# Altium PCB Probe-input.PcbDoc
Units mm, origin at the board's own origin, x right, y up, seen from the top; angles counter-clockwise.
Board outline 32 x 20 mm, 4 copper layers (Top, Ground, Signal/Power, Bottom), stack 1.553 mm thick; 15 components, 32 nets, 49 pads, 78 vias.
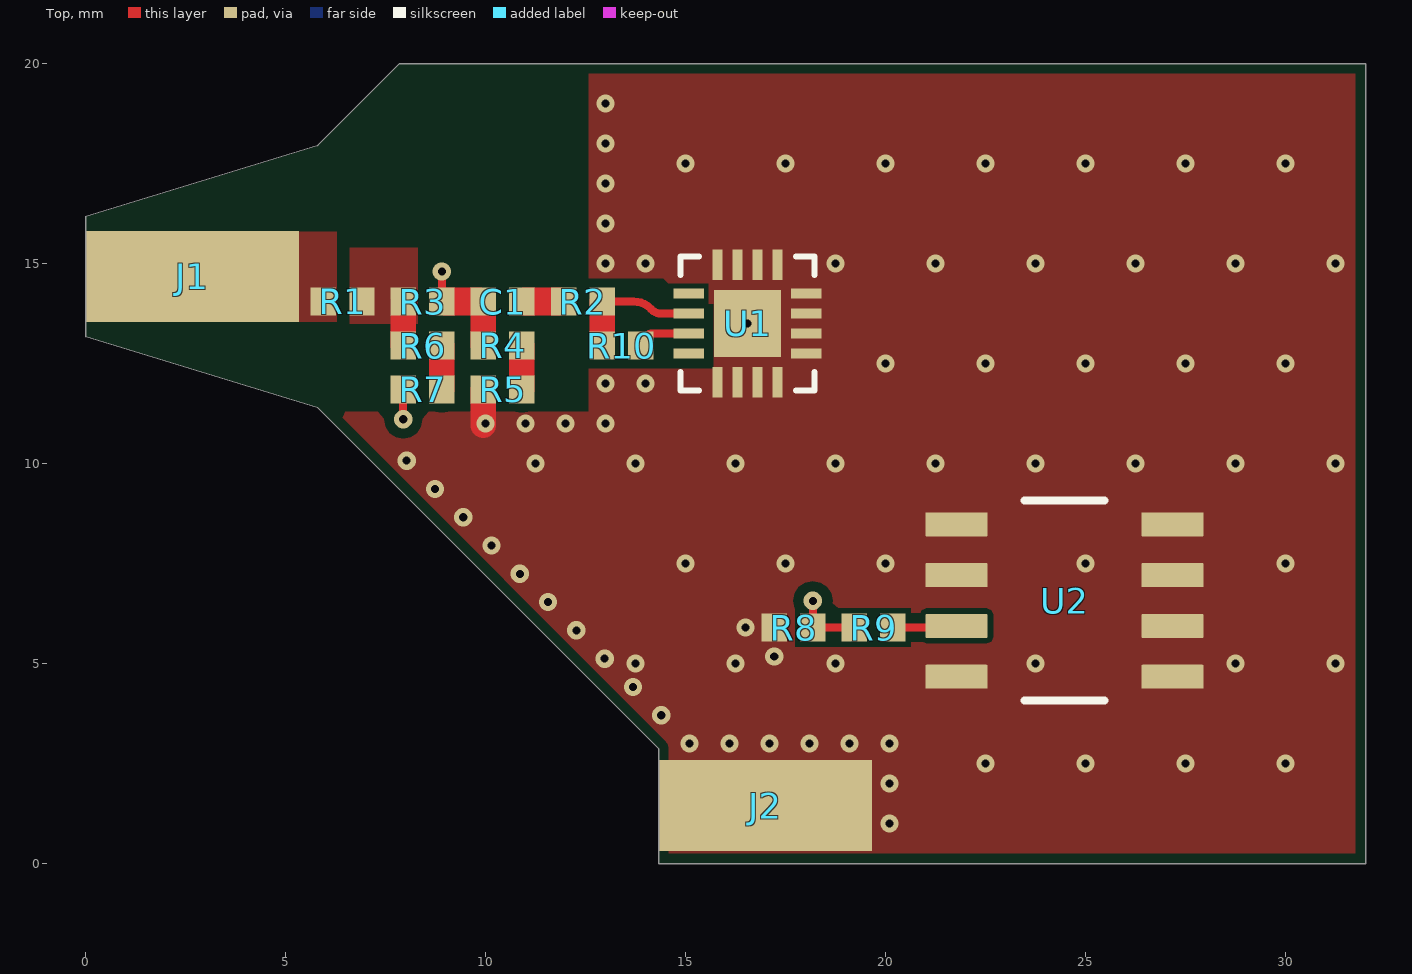
[diagram p0: Top view]
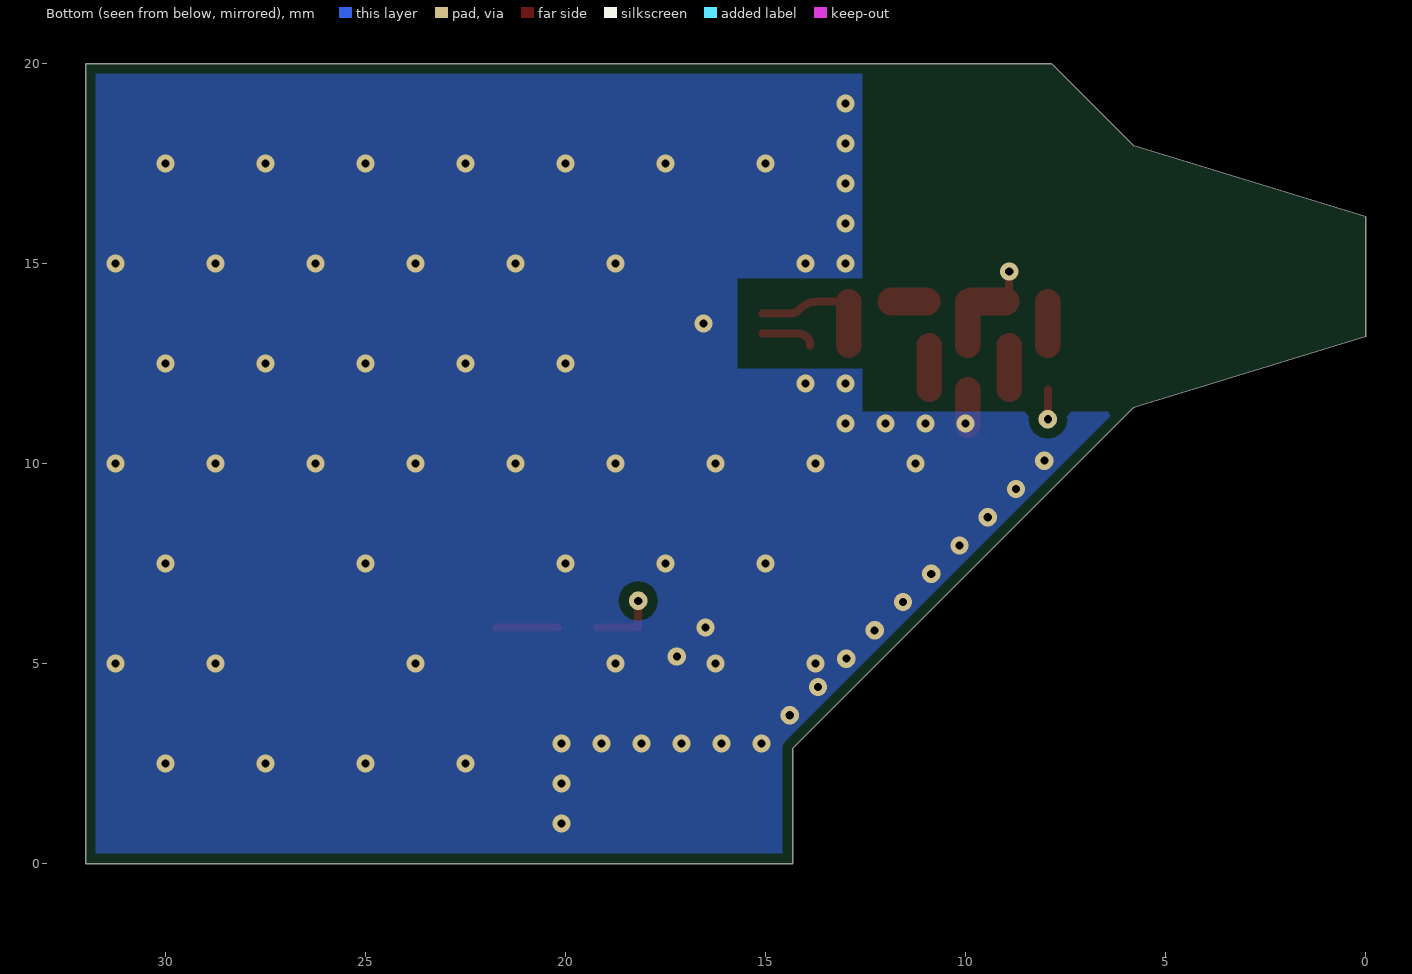
[diagram p1: Bottom view, seen from below]
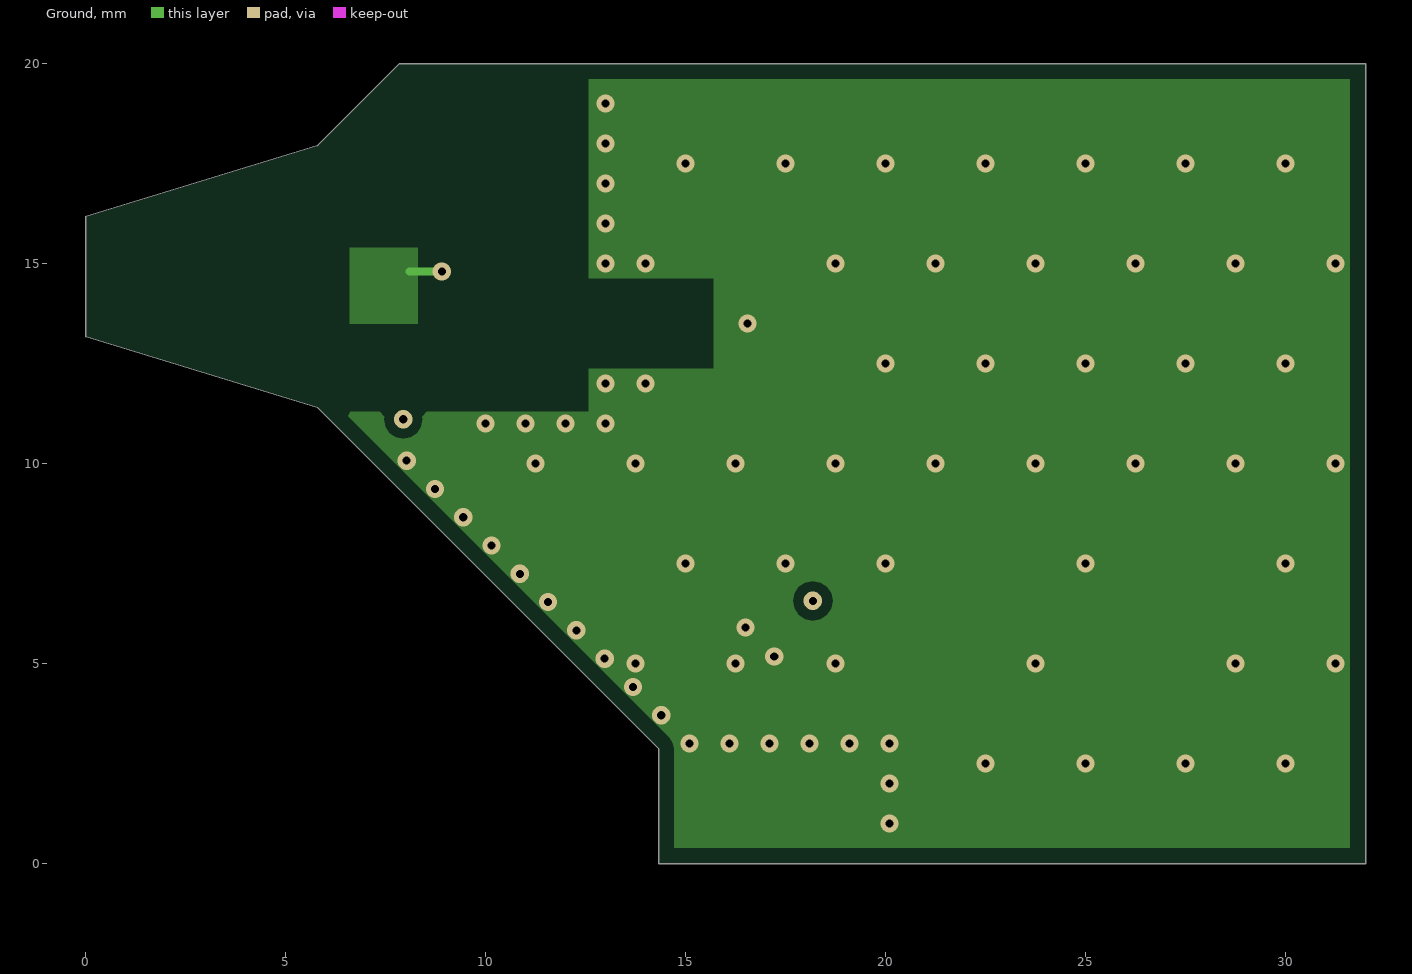
[diagram p2: Ground]
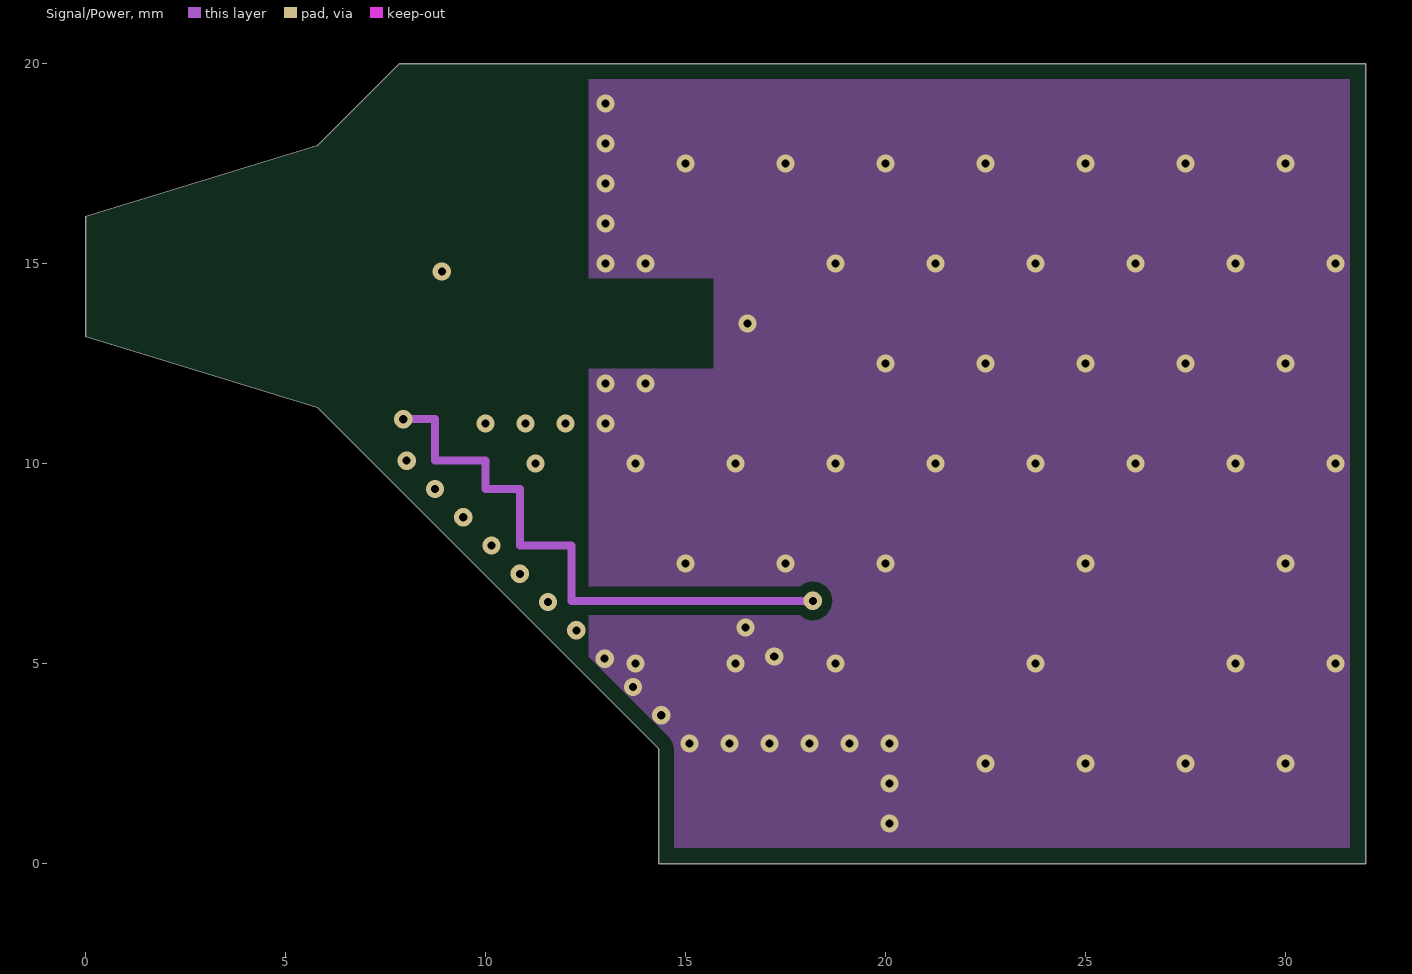
[diagram p3: Signal/Power]
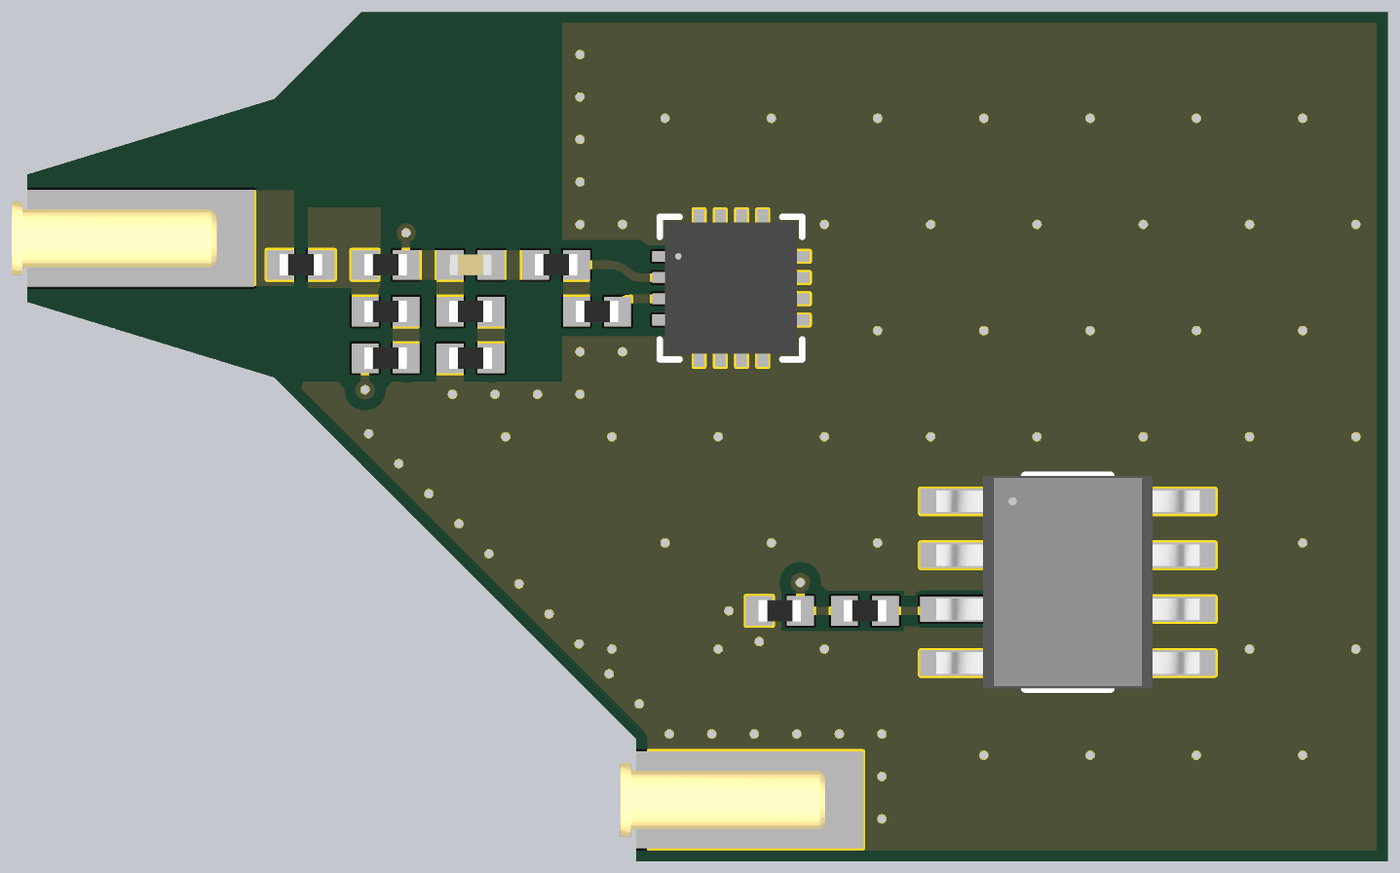
[diagram p4: 3D render of the assembled board from above, using the file's embedded part models]

## Layer stack, top to bottom
Top Solder: solder mask 0.0254, Solder Resist, Dk 3.5
Top: signal copper 0.0432
Dielectric 1: core 0.2022, FR-4, Dk 3.68
Ground: signal copper 0.036
Dielectric 3: core 0.9906, Dk 3.68
Signal/Power: signal copper 0.036
Dielectric 4: prepreg 0.2022, Dk 3.68
Bottom: signal copper 0.0432
Bottom Solder: solder mask 0.0254, Solder Resist, Dk 3.5

## Board outline
0,13.175 0,16.175 5.8,17.95 7.85,20 32,20 32,0 14.325,0 14.325,2.875 5.8,11.4

## Design rules (kind name [scope] priority, off if disabled: settings)
BoardOutlineClearance BoardOutlineClearance_outer [OnOutside] p1: gap=0.254 ignorepadtopadclearanceinfootprint=FALSE
BoardOutlineClearance BoardOutlineClearance_inner [not OnOutside] p2: gap=0.381 ignorepadtopadclearanceinfootprint=FALSE
Clearance [All] p1: gap=0.254 ignorepadtopadclearanceinfootprint=FALSE except(0: Arc-Hole Track-Hole SMDPad-Hole THPad-Hole Via-Hole Fill-Hole Poly-Hole Region-Hole Text-Hole; 0.127: SMDPad-SMDPad SMDPad-Fill SMDPad-Poly SMDPad-Region)
MinimumSolderMaskSliver [All] p1: minsoldermaskwidth=0.127
PlaneConnect [All] p1: planeconnectstyle=Direct reliefexpansion=0.508 reliefentries=4 reliefconductorwidth=0.254 reliefairgap=0.254
PolygonConnect [All] p1: connectstyle=Direct reliefconductorwidth=0.254 reliefentries=4 polygonreliefangle="90 Angle" airgapwidth=0.254
RoutingVias [All] p1: holewidth=0.457 width=0.457 viastyle="Through Hole" minholewidth=0.203 minwidth=0.457 maxholewidth=0.711 maxwidth=1.27
SilkToSolderMaskClearance [IsPad] p1: minsilkscreentomaskgap=0.127 clearancetoexposedcopper=TRUE
SolderMaskExpansion [All] p1: expansion=0.051
Width [All] p1: maxlimit=5.08 minlimit=0.102 preferedwidth=0.254
27 further rules are at their usual default settings.

## Classes and differential pairs
component class Power: C6 C7 C11 C13 C14 C15 C20 C21 C? R22 R23 R? U3 U?

## Components (designator, comment, footprint, x,y, rotation, side; value= is the part's Value field where it differs from the comment)
C1 "330p" CAPC0402(1005)50_M 10.425,14.05 r0 top
J1 "0339-0-15-01-15-27-10-0" "MILL-MAX 0339"#1 0.008,14.675 r0 top
J2 "0339-0-15-01-15-27-10-0" "MILL-MAX 0339"#2 14.325,1.45 r0 top
R1 "82" RESC0402(1005)_M 6.43,14.05 r0 top
R2 "100" RESC0402(1005)_M 12.435,14.05 r0 top
R3 "1.60M" RESC0402(1005)_M 8.425,14.05 r0 top
R4 "200K" RESC0402(1005)_M 10.425,12.95 r0 top
R5 "200K" RESC0402(1005)_M 10.425,11.85 r180 top
R6 "976K" RESC0402(1005)_M 8.425,12.95 r0 top
R7 "953K" RESC0402(1005)_M 8.425,11.85 r180 top
R8 "66.5k" RESC0402(1005)_M 17.7,5.9 r180 top value=66.5K
R9 "68" RESC0402(1005)_M 19.7,5.9 r0 top
R10 "10.0M" RESC0402(1005)_M 13.4,12.95 r0 top
U1 "BUF802" "VQFN16_RGT_TEX- OSHPARK" 16.55,13.5 r0 top
U2 "ADA4625" SOIC-8 24.475,6.575 r0 top

## Footprints (in the part's own frame and the unit in brackets; to place one, negate y for a bottom-side part, rotate by r counter-clockwise, add the part's x,y. Pads: shape width x height; smd on the part's side, far side on the other; paste and mask are expansions set on the pad)
CAPC0402(1005)50_M [mm] "Chip Capacitor, Body 1.0x0.5mm, Height 0.5mm, IPC Low  Density"
  rect 0.635x0.7 smd: 1(-0.483,0) 2(0.483,0)
  body extent -0.5,-0.25 0.5,0.25, height 0.5
"MILL-MAX 0339"#1 [mil] "MILL-MAX 0339"
  rect 210x90 smd: 1(104.69,0)
  body extent -15,-34 175,34, height 61
"MILL-MAX 0339"#2 [mil] "MILL-MAX 0339"
  rect 210x90 smd: 1(105,0)
  body extent -15,-34 175,34, height 61
RESC0402(1005)_M [mm] "Chip Resistor, Body 1.0x0.5mm, IPC Low Density"
  rect 0.635x0.7 smd: 1(-0.483,0) 2(0.482,0)
  body extent -0.5,-0.25 0.5,0.25, height 0.35
SOIC-8 [mm] "SOIC-8"
  rrect8% 1.55x0.6 smd: 1(-2.7,1.905) 2(-2.7,0.635) 3(-2.7,-0.635) 4(-2.7,-1.905) 5(2.7,-1.905) 6(2.7,-0.635) 7(2.7,0.635) 8(2.7,1.905)
  silkscreen extent -1,-2.5 1,2.5, body extent -3.1,-2.5 3.1,2.5, height 1.76
"VQFN16_RGT_TEX- OSHPARK" [mil]
  rect 30x10 smd: 1(-58,29.53) 2(-58,9.84) 3(-58,-9.85) 4(-58,-29.54) 9(58,-29.54) 10(58,-9.85) 11(58,9.84) 12(58,29.53)
  rect 10x30 smd: 5(-29.53,-58) 6(-9.85,-58) 7(9.85,-58) 8(29.53,-58) 13(29.53,58) 14(9.85,58) 15(-9.85,58) 16(-29.53,58)
  rect 66.14x66.14 smd: 17(0,0)
  silkscreen extent -66,-66 66,66, body extent -61,-61 61,61, height 39

## Part data
C1: library part GRM1555C1H331JA01, "CAP CER 330PF±5% 50V C0G 0402", Capacitance=330pF, Manufacturer=Murata, Manufacturer Part Number=GRM1555C1H331JA01D, Temperature Coefficient=C0G, Tolerance=±5%, Part Number=GRM1555C1H331JA01
J1 J2: "CONN PIN RCPT", Manufacturer=Mill-Max, Max Operating Temperature=125°C, Min Operating Temperature=-55°C, Supplier Part Number 1=0339-0-15-01-15-27-10-0-ND, ComponentLink1Description=https://www.mill-max.com/assets/pdfs/172.pdf?src-supplier=Digi-Key, ComponentLink1URL=https://www.mill-max.com/assets/pdfs/172.pdf?src-supplier=Digi-Key, ComponentLink2Description=https://datasheet.octopart.com/0339-0-15-01-15-27-10-0-Mill-Max-datasheet-26446830.pdf?src-supplier=Future+Electronics, ComponentLink2URL=https://datasheet.octopart.com/0339-0-15-01-15-27-10-0-Mill-Max-datasheet-26446830.pdf?src-supplier=Future+Electronics, ComponentLink3Description=http://www.mouser.com/ds/2/273/172M-276194.pdf?src-supplier=Mouser, ComponentLink3URL=http://www.mouser.com/ds/2/273/172M-276194.pdf?src-supplier=Mouser, ComponentLink4Description=https://datasheet.octopart.com/0339-0-15-01-15-27-10-0-Mill-Max-datasheet-155663258.pdf?src-supplier=Sager+Electronics, ComponentLink4URL=https://datasheet.octopart.com/0339-0-15-01-15-27-10-0-Mill-Max-datasheet-155663258.pdf?src-supplier=Sager+Electronics, Contact Material=Copper, Contact Plating=Gold, Manufacturer Part Number=0339-0-15-01-15-27-10-0, Packaging=Bulk, Pricing 1="1=1.42, 10=1.234, 25=1.1812, 50=1.155, 100=1.1025, 250=0.99748, 500=0.91874, 1000=0.7875, 2500=0.735 (USD)", RoHS Compliant=No, Series=0339, Stock 1=989, Supplier 1=Digi-Key, Supplier 2=Mouser, Supplier Part Number 2=575-0339015011527100, Termination=Solder
R1: library part RESC0402-82R0-1pct, "RES 82 OHM 1% 1/16W 0402", Manufacturer 1=Yageo, Manufacturer 2="Stackpole Electronics", Manufacturer 3="Vishay Dale", Manufacturer 4="Panasonic Electronic Components", Manufacturer Part Number 1=RC0402FR-0782RL, Manufacturer Part Number 2=RMCF0402FT82R0, Manufacturer Part Number 3=CRCW040282R0FKED, Manufacturer Part Number 4=ERJ-2RKF82R0X, Ohms=82, Part Number=RESC0402-82R0-1pct
R2: library part RESC0402-100R-1pct, "RES 100 OHM 1% 1/16W 0402", Manufacturer 1=Yageo, Manufacturer 2="Stackpole Electronics", Manufacturer 3="Vishay Dale", Manufacturer 4="Panasonic Electronic Components", Manufacturer Part Number 1=RC0402FR-07100RL, Manufacturer Part Number 2=RMCF0402FT100R, Manufacturer Part Number 3=CRCW0402100RFKED, Manufacturer Part Number 4=ERJ-2RKF1000X, Ohms=100, Part Number=RESC0402-100R-1pct
R3: library part RESC0402-1M60-1pct, "RES 1.60M OHM 1% 1/16W 0402", Manufacturer 1=Yageo, Manufacturer 2="Stackpole Electronics", Manufacturer 3="Vishay Dale", Manufacturer 4="Panasonic Electronic Components", Manufacturer Part Number 1=RC0402FR-071M6L, Manufacturer Part Number 2=RMCF0402FT1M60, Manufacturer Part Number 3=CRCW04021M60FKED, Ohms=1600000, Part Number=RESC0402-1M60-1pct
R4 R5: library part RESC0402-200K-1pct, "RES 200K OHM 1% 1/16W 0402", Manufacturer 1=Yageo, Manufacturer 2="Stackpole Electronics", Manufacturer 3="Vishay Dale", Manufacturer 4="Panasonic Electronic Components", Manufacturer Part Number 1=RC0402FR-07200KL, Manufacturer Part Number 2=RMCF0402FT200K, Manufacturer Part Number 3=CRCW0402200KFKED, Manufacturer Part Number 4=ERJ-2RKF2003X, Ohms=200000, Part Number=RESC0402-200K-1pct
R6: library part RESC0402-976K-1pct, "RES 976K OHM 1% 1/16W 0402", Manufacturer 1=Yageo, Manufacturer 2="Stackpole Electronics", Manufacturer 3="Vishay Dale", Manufacturer 4="Panasonic Electronic Components", Manufacturer Part Number 1=RC0402FR-07976KL, Manufacturer Part Number 2=RMCF0402FT976K, Manufacturer Part Number 3=CRCW0402976KFKED, Manufacturer Part Number 4=ERJ-2RKF9763X, Ohms=976000, Part Number=RESC0402-976K-1pct
R7: library part RESC0402-953K-1pct, "RES 953K OHM 1% 1/16W 0402", Manufacturer 1=Yageo, Manufacturer 2="Stackpole Electronics", Manufacturer 3="Vishay Dale", Manufacturer 4="Panasonic Electronic Components", Manufacturer Part Number 1=RC0402FR-07953KL, Manufacturer Part Number 2=RMCF0402FT953K, Manufacturer Part Number 3=CRCW0402953KFKED, Manufacturer Part Number 4=ERJ-2RKF9533X, Ohms=953000, Part Number=RESC0402-953K-1pct
R8: library part RESC0402-66K5-1pct, "RES 66.5K OHM 1% 1/16W 0402", Manufacturer 1=Yageo, Manufacturer 2="Stackpole Electronics", Manufacturer 3="Vishay Dale", Manufacturer 4="Panasonic Electronic Components", Manufacturer Part Number 1=RC0402FR-0766K5L, Manufacturer Part Number 2=RMCF0402FT66K5, Manufacturer Part Number 3=CRCW040266K5FKED, Manufacturer Part Number 4=ERJ-2RKF6652X, Ohms=66500, Part Number=RESC0402-66K5-1pct
R9: library part RESC0402-68R0-1pct, "RES 68 OHM 1% 1/16W 0402", Manufacturer 1=Yageo, Manufacturer 2="Stackpole Electronics", Manufacturer 3="Vishay Dale", Manufacturer 4="Panasonic Electronic Components", Manufacturer Part Number 1=RC0402FR-0768RL, Manufacturer Part Number 2=RMCF0402FT68R0, Manufacturer Part Number 3=CRCW040268R0FKED, Manufacturer Part Number 4=ERJ-2RKF68R0X, Ohms=68, Part Number=RESC0402-68R0-1pct
R10: library part RESC0402-10M0-1pct, "RES 10.0M OHM 1% 1/16W 0402", Manufacturer 1=Yageo, Manufacturer 2="Stackpole Electronics", Manufacturer 3="Vishay Dale", Manufacturer 4="Panasonic Electronic Components", Manufacturer Part Number 1=RC0402FR-0710ML, Manufacturer Part Number 2=RMCF0402FT10M0, Manufacturer Part Number 3=CRCW040210M0FKED, Ohms=10000000, Part Number=RESC0402-10M0-1pct
U1: library part BUF802IRGTR, "WIDE-BANDWIDTH JFET BUFFER", Manufacturer="Texas Instruments", Supplier Part Number 1=296-BUF802IRGTRCT-ND, Manufacturer Part Number=BUF802IRGTR, Pricing 1="1=5.06, 10=4.541, 25=4.2928, 100=3.7206, 250=3.5298, 500=3.16728, 1000=2.88 (USD)", Stock 1=1253, Supplier 1=Digi-Key, Supplier 2=Mouser, Supplier Part Number 2=595-BUF802IRGTR
U2: library part ADA4625-1ARDZ, "IC OPAMP JFET 8SOIC", Input Bias Current=15pA, Input Offset Voltage (Vos)=15uV, Manufacturer="Analog Devices", Max Operating Temperature=125°C, Min Operating Temperature=-40°C, Operating Supply Current=4mA, Output Current per Channel=33mA, Supplier Part Number 1=505-ADA4625-1ARDZ-ND, -3db Bandwidth=16MHz, ComponentLink1Description=https://www.analog.com/media/en/technical-documentation/data-sheets/ADA4625-1.pdf?src-supplier=Digi-Key, ComponentLink1URL=https://www.analog.com/media/en/technical-documentation/data-sheets/ADA4625-1.pdf?src-supplier=Digi-Key, Gain Bandwidth Product=18MHz, Manufacturer Part Number=ADA4625-1ARDZ, Mount="Surface Mount", Number of Circuits=1, Number of Pins=8, Packaging=Rail/Tube, Pricing 1="1=12.08, 10=10.916, 25=10.4088, 100=9.0378, 250=8.6316, 500=7.86996, 1000=7.185 (USD)", RoHS Compliant=Yes, Series=-, Slew Rate=48V/µs, Stock 1=2217, Supplier 1=Digi-Key, Supplier 2=Mouser, Supplier Part Number 2=584-ADA4625-1ARDZ

## Via types
v1: diameter 0.457, hole 0.203, Top to Bottom, tented both sides, 78 vias

## Nets (pads, with @x,y where several pads share a name; then routed paths per layer and width w, separated by ;. In a path a pad name is that pad's centre, name@x,y a point inside that pad or via, vN(x,y) a via of type N, cw(c..) or ccw(c..) an arc to the next point about the centre after c; other vN are vias at no path point)
GND: J2.1 R5.2 R8.2 U1.5 U1.6 U1.7 U1.8 U1.9 U1.10 U1.11 U1.12 U1.13 U1.14 U1.15 U1.16 U1.17 U2.1 U2.2 U2.4 U2.5 U2.6 U2.7 U2.8 | length 0.9
  Top w0.635: v1@9.942,10.958 R5.2
  other v1: 20.1,1 20.1,2 22.5,2.5 25,2.5 27.5,2.5 30,2.5 15.1,3 16.1,3 17.1,3 18.1,3 19.1,3 20.1,3 14.393,3.707 13.686,4.414 13.75,5 16.25,5 18.75,5 23.75,5 28.75,5 31.25,5 12.979,5.121 17.217,5.175 12.272,5.828 16.5,5.9 11.564,6.536 10.857,7.243 15,7.5 17.5,7.5 20,7.5 25,7.5 30,7.5 10.15,7.95 9.443,8.657 8.736,9.364 11.25,10 13.75,10 16.25,10 18.75,10 21.25,10 23.75,10 26.25,10 28.75,10 31.25,10 8.029,10.071 10,11 11,11 12,11 13,11 13,12 14,12 20,12.5 22.5,12.5 25,12.5 27.5,12.5 30,12.5 16.55,13.5 13,15 14,15 18.75,15 21.25,15 23.75,15 26.25,15 28.75,15 31.25,15 13,16 13,17 15,17.5 17.5,17.5 20,17.5 22.5,17.5 25,17.5 27.5,17.5 30,17.5 13,18 13,19
GUARD: C1.1 R3.2 R4.1 | length 3.5
  Top w0.2: R3.2 v1(8.907,14.8)
  Top w0.635: R4.1 C1.1
  Top w0.7: R3.2@9,14.05 C1.1@9.85,14.05
  Ground w0.2: 8.1,14.8 v1(8.907,14.8)
NetC1_2: C1.2 R2.1 | length 0.9
  Top w0.7: C1.2@10.975,14.05 R2.1@11.85,14.05
NetC2_1: 
NetC2_2: 
NetC3_1: 
NetC4_1: 
NetC5_1: 
NetC5_2: 
NetC6_1: 
NetC7_1: 
NetD1_1: 
NetD2_1: 
NetJ3_1: 
NetR1_2: R1.2 R3.1 R6.1 | length 1.1
  Top w0.635: R6.1 R3.1
NetR2_2: R2.2 R10.1 U1.2 | length 3.3
  Top w0.2: R2.2 13.703,14.05 cw(c13.703,13.453) 14.125,13.875 14.15,13.85 ; 14.15,13.85 ccw(c14.392,14.092) 14.392,13.75 U1.2
  Top w0.635: R10.1 R2.2
NetR4_2: R4.2 R5.1 | length 1.1
  Top w0.635: R5.1@10.908,11.85 R4.2
NetR6_2: R6.2 R7.1 | length 1.1
  Top w0.635: R7.1 R6.2
NetR7_2: R7.2 R8.1 R9.1 | length 17.2
  Top w0.2: v1(7.942,11.107) R7.2 ; v1(18.182,6.567) R8.1 R9.1
  Signal/Power w0.2: v1(7.942,11.107) 8.736,11.107 8.736,10.071 10,10.071 10,9.364 10.857,9.364 10.857,7.95 12.147,7.95 12.147,6.567 v1(18.182,6.567)
NetR9_2: R9.2 U2.3 | length 1.6
  Top w0.2: R9.2 U2.3@21.735,5.9
NetR10_2: R10.2 U1.3 | length 1.4
  Top w0.2: R10.2 cw(c14.182,12.95) 14.182,13.25 U1.3
NetR11_2: 
NetR12_2: 
NetR16_1: 
NetR17_1: 
NetR18_1: 
NetR23_2: 
TIP: J1.1 R1.1
V+: 
V-: 
VDD: 
VSS: 
pads on no net: U1.1 U1.4

## Polygon pours and split planes (outlines as drawn)
GND on Top "GND_L01_P049" (solid, pour order 49): 12.583,11.3 5.9,11.3 5.9,0 32,0 32,20 12.583,20
NetR1_2 on Top "NETR1_2_L01_P033" (solid, pour order 33): 6.6,13.5 8.3,13.5 8.3,15.4 6.6,15.4
TIP on Top "TIP_L01_P032" (solid, pour order 32): 4.575,15.8 6.275,15.8 6.275,13.55 4.575,13.55
GND on Ground "GND_L02_P051" (solid, pour order 51): 12.583,11.3 5.875,11.3 5.875,0 32,0 32,20 12.583,20
GUARD on Ground "GUARD_L02_P050" (solid, pour order 50): 6.6,13.5 8.3,13.5 8.3,15.4 6.6,15.4
GND on Bottom "GND_L04_P052" (solid, pour order 52): 12.583,11.3 5.9,11.3 5.9,0 12.583,0 32,0 32,20 12.583,20
GND on Signal/Power "GND_L03_P054" (solid, pour order 54): 32,0 32,20 12.583,20 12.583,0

## Other copper
Top:
  pour cut-out: 14.444,14.631 14.444,14 15.71,14 15.71,12.369 12.583,12.369 12.583,14.631
Signal/Power:
  pour cut-out: 15.71,12.369 12.583,12.369 12.583,14.631 15.71,14.631
Ground:
  pour cut-out: 15.71,12.369 12.583,12.369 12.583,14.631 15.71,14.631
Bottom:
  pour cut-out: 15.71,12.369 12.583,12.369 12.583,14.631 15.71,14.631

## Silkscreen, mask and mechanical layers (free items; w line width, h text height)
Mechanical 1:
  the board outline again, w0.1

## Text inside footprints (layer, text, board x,y; h text height)
U1: Mechanical 8 "*" at 13.743,13.865 h1.27